# Altium PCB Cubit2_0.PcbDoc (part 4 of 4)
Units mm, origin at the board's own origin, x right, y up, seen from the top; angles counter-clockwise.
Board outline 116.28 x 70 mm, 4 copper layers (Top Layer, Layer 2, Layer 3, Bottom Layer), stack 0.602 mm thick; 141 components, 99 nets, 462 pads, 294 vias.
Unrouted connection lines stored in the file: 2.
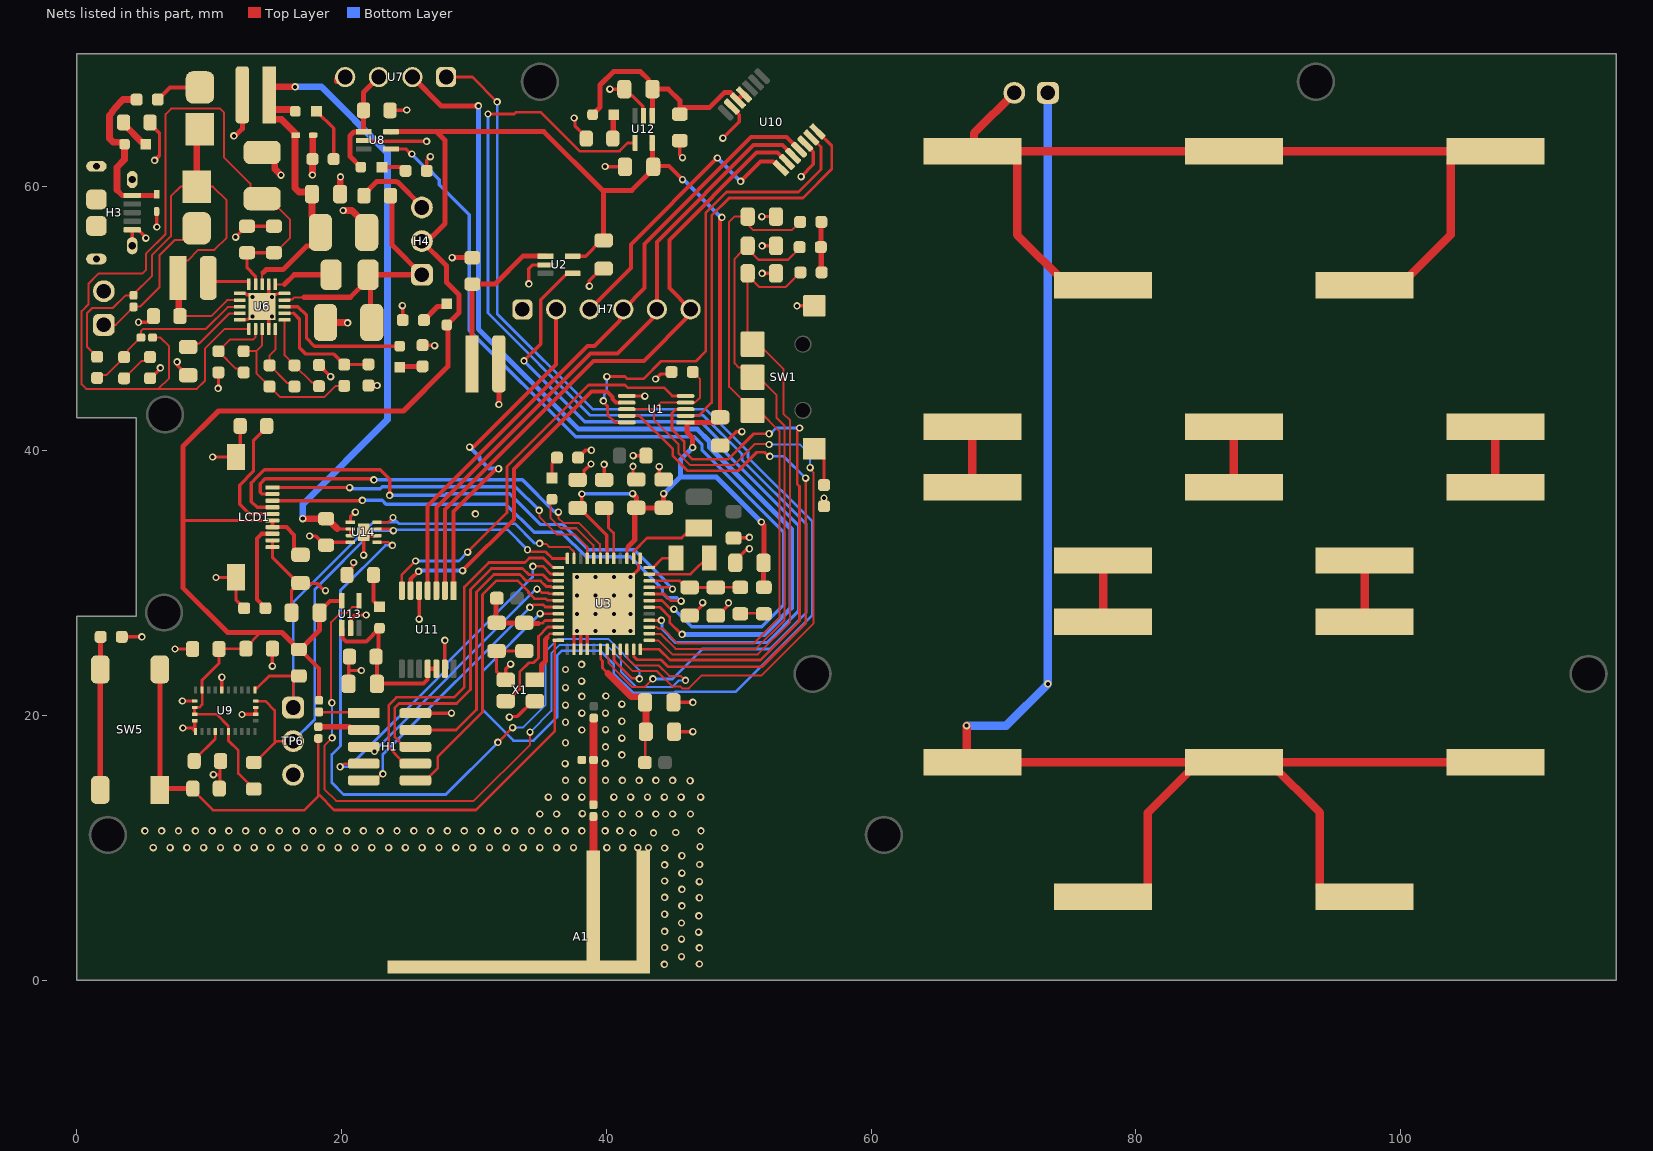
[diagram p4: the nets of this part, all layers, seen from the top]

## Via types
v1: diameter 0.559, hole 0.305, Top Layer to Bottom Layer, tented both sides, 291 vias
v2: diameter 0.61, hole 0.305, Top Layer to Bottom Layer, tented both sides, 2 vias
v3: diameter 0.559, hole 0.305, Top Layer to Bottom Layer, 1 vias

## Nets (pads, with @x,y where several pads share a name; then routed paths per layer and width w, separated by ;. In a path a pad name is that pad's centre, name@x,y a point inside that pad or via, vN(x,y) a via of type N, cw(c..) or ccw(c..) an arc to the next point about the centre after c; other vN are vias at no path point) (continued)
+3V2_VMCU: C1.1 C6.1 C13.1 C14.1 C17.1 C29.1 C30.1 C33.1 C38.1 C39.1 C41.1 H4.2 L6.1 LCD1.6 LCD1.7 LED6.A R10.1 R11.1 R12.1 U1.1 U2.5 U3.39 U3.42 U8.5 U9.3 U9.4 U9.11 U9.28 U12.5 U13.5 | length 195.7
  Top Layer w0.203: R10.1@13.36,14.463 13.341,14.463 12.954,14.85 12.954,14.87 12.192,15.632 12.192,17.368 11.451,18.109 U9.11@11.451,18.803 11.432,18.822 11.432,19.213 10.529,20.115 U9.4@8.889,20.115 U9.3@8.889,20.615 8.98,20.615 9,20.635 9.249,20.635 9.457,20.843 9.457,21.922 U9.28@9.451,21.928 9.451,22.679 10.738,23.966 C30.1@10.738,25.039 10.75,25.052 12.754,25.052 C29.1@12.767,25.064 12.767,25.164 13.835,26.233
  Top Layer w0.254: 8.152,34.746 LCD1.6@14.771,34.746 ; U2.5@37.45,54.713 38.426,54.713 39.622,55.91 C41.1@39.788,55.91 ; C17.1@37.821,35.687 37.987,35.687 40.023,33.651 40.023,32.69 40.052,32.661 U3.42@40.052,31.883 ; C17.1@37.884,35.751 38.133,36 38.133,36.747 v1(38.14,36.754) ; 39.7,59.69 39.788,59.602 ; U3.39@41.552,31.883 41.552,32.68 41.657,32.785
  Top Layer w0.305: LCD1.6@14.771,34.746 LCD1.7@14.771,34.246 15.817,34.246 16.414,33.649 16.414,32.529 16.786,32.156 C1.1@16.891,32.156 ; R11.1@16.864,25.007 18.288,23.583 R12.1@18.288,21.166 ; C39.1@18.339,27.788 18.339,27.892 19.123,28.677 U13.5@20.015,28.677 ; C38.1@43.469,61.535 44.713,61.535 v1(45.745,60.503) ; C6.1@48.59,42.545 48.59,57.451 48.723,57.584 v1(48.723,57.652)
  Top Layer w0.381: C39.1@18.339,27.788 18.339,26.482 16.864,25.007 R11.1@16.764,25.007 15.488,26.283 13.835,26.283 11.385,26.283 8.001,29.667 8.001,34.595 8.001,34.746 8.001,40.335 10.693,43.028 24.663,43.028 28.016,46.38 28.016,49.441 LED6.A@27.94,49.517 28.88,50.457 28.88,51.778 27.915,52.743 27.915,54 H4.2@26.06,55.855 26.404,55.855 26.794,56.245 26.883,56.245 27.813,57.175 27.813,63.475 27.169,64.119 ; U8.5@23.724,64.11 23.733,64.119 27.169,64.119 ; C41.1@39.788,55.91 39.788,59.602 ; 41.657,32.785 42.14,33.269 42.14,35.587 C13.1@42.266,35.712 42.266,36.49 41.982,36.773 v1(41.982,36.779) ; C13.1@42.393,35.687 C14.1@44.323,35.687 ; U12.5@43.459,63.271 43.469,63.262 C38.1@43.469,61.535 ; C38.1@43.536,61.468 43.536,61.301 41.924,59.69 39.7,59.69 35.271,64.119 27.169,64.119 ; C14.1@44.323,35.712 v1(44.323,36.779) ; U1.1@46.098,42.101 46.098,41.398 46.513,40.983 v1(46.513,40.264) ; U1.1@46.098,42.152 C6.1@48.574,42.152 ; v1(51.701,34.632) 51.701,34.584 51.892,34.393 C33.1@51.892,31.572 ; C33.1@51.867,31.547 51.88,31.534 51.88,29.715 L6.1@51.892,29.702
  Bottom Layer w0.254: v1(38.14,36.754) 38.152,36.767 41.97,36.767 v1(41.982,36.779)
  Bottom Layer w0.305: v1(45.745,60.503) 45.809,60.503 48.659,57.652 v1(48.723,57.652)
  Bottom Layer w0.381: v1(44.323,36.779) 45.58,38.036 ; v1(46.513,40.264) 45.58,39.332 45.58,38.036 ; v1(51.701,34.632) 48.297,38.036 45.58,38.036
+3V2_VMCU_S: R2.2 R3.2 R5.2 | length 3.9
  Top Layer w0.381: R2.2@56.236,57.302 56.216,57.283 56.216,55.416 R3.2@56.197,55.397 56.229,55.366 56.229,53.524 R5.2@56.261,53.492
+3V7_VBAT: C24.1 C25.1 C42.1 H2.V+ LED7.A U4.1 U6.18 U14.2 U14.3 | length 67.8
  Top Layer w0.152: U6.18@13.995,52.592 13.995,53.402 14.066,53.472
  Top Layer w0.203: 19.66,34.145 19.697,34.108 U14.2@20.663,34.108 U14.3@20.663,33.608
  Top Layer w0.381: 14.066,53.472 14.289,53.696 15.573,53.696 17.36,55.483 17.727,55.483 18.392,56.148 C24.1@18.392,56.515
  Top Layer w0.508: U4.1@16.475,63.802 16.475,59.865 16.773,59.567 17.598,59.567 C25.1@17.755,59.411 17.755,57.777 18.392,57.139 C24.1@18.392,56.515 ; v1(16.485,67.513) 14.783,67.513 14.529,67.259 H2.V+@14.529,66.904 H2.V+@14.529,66.059 ; LED7.A@16.497,65.659 16.351,65.805 14.783,65.805 H2.V+@14.529,66.059 ; U4.1@16.6,63.909 15.455,65.054 14.783,65.054 14.529,65.308 H2.V+@14.529,66.059 ; v1(17.059,34.884) C42.1@18.821,34.884 18.921,34.884 19.66,34.145
  Bottom Layer w0.508: v1(16.485,67.513) 18.466,67.513 23.47,62.509 23.47,42.367 17.059,35.957 v1(17.059,34.884)
+5V_VBUS: H3.1 LED8.A R23.1 U5.1 | length 12.4
  Top Layer w0.381: 3.025,59.713 3.432,59.306 U5.1@5.95,59.306
  Top Layer w0.508: 3.025,59.713 3.025,61.435 3.598,62.008 LED8.A@3.598,63.17 3.452,63.316 2.761,63.316 2.613,63.464 2.464,63.613 2.464,65.35 cw(c10,60.008) 3.181,66.239 3.489,66.548 R23.1@4.509,66.548
AVDD: C18.1 C19.1 R17.2 U3.34 | length 7.1
  Top Layer w0.203: U3.34@43.237,30.198 45.53,30.198 46.036,29.693 C19.1@46.292,29.693 48.273,29.693 48.278,29.697 50.148,29.697 R17.2@50.153,29.702
BATT_MON_ALRT: U3.20 U14.5 | length 57.2
  Top Layer w0.203: U14.5@22.669,33.126 22.687,33.108 23.488,33.108 23.729,32.868 v1(23.825,32.868) ; v1(31.801,17.983) v1(32.918,19.101) ; U3.20@40.552,25.013 40.566,24.999 40.566,24.502 40.572,24.496 40.572,24.172 41.91,22.834 42.44,22.834 v1(42.494,22.78)
  Bottom Layer w0.152: v1(32.918,19.101) 33.68,19.101 35.408,20.828 35.408,24.858 36.33,25.781 40.163,25.781 42.494,23.45 v1(42.494,22.78)
  Bottom Layer w0.203: v1(23.825,32.868) 23.301,32.868 19.914,29.48 19.914,17.729 19.253,17.069 19.253,14.935 20.142,14.046 27.864,14.046 v1(31.801,17.983)
BRD_Reset: C20.1 R13.1 SW5.1 SW5.2 U3.12 | length 54.6
  Top Layer w0.203: C20.1@8.754,14.398 10.287,12.865 17.181,12.865 18.237,13.92 ; R13.1@18.237,18.288 18.237,13.92 ; U3.12@36.367,25.698 36.122,25.698 36.094,25.67 36.094,18.822 30.154,12.882 19.431,12.882 18.315,13.998 18.237,13.92
  Top Layer w0.381: SW5.2@6.263,23.493 SW5.1@6.263,14.393 6.368,14.498 C20.1@8.754,14.498 C20.1@8.754,14.398
DECOUPLE: C16.1 U3.41 | length 4.1
  Top Layer w0.203: C16.1@39.913,35.679 40.159,35.433 40.159,34.198 40.552,33.805 U3.41@40.552,31.883
FEED: A1.FEED L2.2 | length 6.8
  Top Layer w0.254: A1.FEED@38.964,5.613 A1.FEED@39.014,5.664
  Top Layer w0.62: A1.FEED@39.014,5.664 L2.2@39.014,12.387
GND: A1.GND C1.2 C2.2 C3.2 C4.2 C5.2 C6.2 C7.2 C8.2 C9.2 C10.2 C11.2 C12.2 C13.2 C14.2 C15.2 C16.2 C17.2 C18.2 C19.2 C20.2 C21.2 C22.2 C23.2 C24.2 C25.2 C26.2 C27.2 C28.2 C29.2 C30.2 C31.2 C32.2 C33.2 C34.2 C35.2 C36.2 C37.2 C38.2 C39.2 C40.2 C41.2 C42.2 H1.2 H2.V- H3.5 H3.S1 H3.S2 H3.S3 H3.S4 H3.S5 H3.S6 H5.2 H7.1 H8.V- LCD1.9 LCD1.10 LCD1.11 LCD1.12 R1.1 R4.2 R6.1 R16.2 R18.1 R20.2 R26.1 R27.2 R31.2 R32.1 R34.1 R35.2 R36.1 R38.2 R40.2 R42.2 SW1.5 TP6.3 U1.6 U2.2 U3.0 U3.14 U3.15 U3.16 U3.37 U4.2 U5.2 U6.0 U6.1 U6.5 U6.9 U6.15 U6.17 U7.4 U8.2 U9.2 U9.5 U9.6 U9.17 U9.18 U9.25 U10.5 U10.13 U11.5 U11.13 U12.2 U13.2 U14.0 U14.1 U14.4 U14.6 X1.2 X1.4 | length 168.6
  Top Layer w0.203: U6.5@12.305,49.902 12.334,49.93 12.897,49.93 12.945,49.978 13.072,49.978 v1(13.259,50.165) ; U6.0@14.859,51.766 14.919,51.825 15.071,51.825 15.126,51.88 15.664,51.88 U6.15@15.685,51.902 ; 42.426,31.072 42.426,31.448 U3.37@42.549,31.571
  Top Layer w0.254: R18.1@3.391,25.959 v1(4.902,25.959) ; H3.S2@4.175,55.506 H3.5@4.175,56.706 4.65,56.706 5.207,56.149 v1(5.207,56.083) ; v1(4.655,49.726) 5.317,49.726 5.385,49.793 5.418,49.793 5.782,50.157 C26.2@5.782,50.19 ; R20.2@5.525,45.496 5.578,45.496 6.299,46.216 v1(6.299,46.279) ; R35.2@5.525,64.821 5.525,64.721 6.238,64.008 6.238,62.322 v1(5.867,61.951) ; U5.2@6.02,58.092 6.02,56.947 v1(6.045,56.921) ; v1(7.411,25.039) C30.2@8.738,25.039 ; v1(7.569,46.736) 7.569,46.467 8.316,45.72 C27.2@8.407,45.72 ; v1(7.968,21.115) U9.2@8.889,21.115 ; v1(8.001,19.075) 8.679,19.075 U9.6@8.951,18.803 8.951,18.936 8.889,18.999 U9.5@8.889,19.615 ; v1(10.26,39.546) LCD1.11@12.021,39.546 12.335,39.86 C2.2@12.335,41.885 ; v1(10.312,15.545) 10.804,15.545 ; v1(10.507,30.446) LCD1.12@12.021,30.446 12.021,28.733 R1.1@12.637,28.118 ; v1(10.668,44.729) 10.693,44.755 R32.1@10.693,45.936 ; C20.2@10.754,14.498 10.804,14.549 10.804,15.545 ; C31.2@10.855,16.581 10.804,16.53 10.804,15.545 ; U9.25@10.951,21.928 v1(10.951,22.907) ; v1(11.989,56.159) 11.989,56.189 12.782,56.982 C23.2@12.852,56.982 C22.2@14.884,56.982 ; U6.1@12.305,51.902 12.308,51.899 12.719,51.899 12.818,51.8 13.097,51.8 v1(13.259,51.638) ; v1(12.471,20.091) 12.493,20.113 U9.17@13.514,20.115 U9.17@13.514,20.115 U9.18@13.514,20.615 ; v1(13.995,50.902) 14.495,51.402 U6.17@14.495,52.592 ; U6.9@14.495,49.212 14.495,50.004 14.657,50.165 v1(14.732,50.165) ; v1(14.732,51.638) U6.0@14.859,51.766 ; v1(14.767,23.74) C29.2@14.767,25.064 ; LCD1.9@14.771,33.246 LCD1.10@14.771,32.746 14.771,31.976 16.724,30.023 C1.2@16.8,30.023 ; U6.15@15.4,51.902 U6.15@15.685,51.902 ; C39.2@16.205,27.788 16.205,29.428 C1.2@16.8,30.023 ; v1@17.577,33.604 v1(17.577,33.579) 18.024,33.579 18.719,32.884 C42.2@18.821,32.884 19.046,33.108 U14.4@20.663,33.108 ; R36.1@18.288,46.495 v1(19.164,45.618) ; v1(18.781,29.454) 18.698,29.454 18.163,29.989 16.925,29.989 C1.2@16.891,30.023 C1.2@16.8,30.023 ; C25.2@19.888,59.411 19.914,59.436 C25.2@19.901,59.449 ; v1@19.901,60.693 v1(19.914,60.706) ; R42.2@20.403,30.632 20.403,30.799 20.843,31.24 20.843,31.516 v1(20.902,31.575) ; v1@20.422,49.708 v1(20.447,49.682) ; C35.2@20.523,22.403 20.523,23.419 ; C37.2@20.523,24.46 20.523,23.419 ; U13.2@20.65,26.594 U13.2@20.676,26.619 20.73,26.673 20.73,27.343 20.997,27.61 v1(21.844,27.61) ; U14.1@20.663,34.608 20.663,35.036 21.009,35.382 v1(21.031,35.382) ; v1(21.488,23.419) 20.523,23.419 ; v1(21.666,32.131) U14.0@21.666,33.858 21.916,33.608 U14.6@22.669,33.608 ; U8.2@21.666,63.449 21.72,63.395 v1(26.416,63.395) ; R34.1@22.022,44.945 v1(22.682,44.945) ; C32.2@23.657,65.735 24.892,65.735 v1(24.917,65.761) ; v1(24.587,50.978) 24.613,50.952 R27.2@24.613,49.886 ; H1.2@25.572,20.193 v1(28.296,20.193) ; v1(25.85,27.298) U11.5@25.85,29.45 ; R26.1@26.111,47.993 26.987,47.993 v1(27.025,47.955) ; R38.2@26.429,61.163 26.429,61.963 v1(26.695,62.23) ; U11.13@27.8,23.55 v1(27.8,25.692) ; X1.2@32.325,22.708 31.699,23.333 C8.2@31.699,24.892 C9.2@33.807,24.892 ; X1.2@32.395,22.708 32.395,23.53 v1(32.766,23.901) ; v1(32.664,19.888) 32.723,19.947 33.284,19.947 34.445,21.108 X1.4@34.595,21.108 ; v1(34.138,52.629) 34.138,53.772 34.419,54.053 U2.2@35.392,54.053 ; U3.14@37.552,25.013 37.552,26.198 v1(37.77,26.416) ; v1(37.567,65.151) 37.625,65.093 37.625,64.558 38.481,63.702 R40.2@38.481,63.602 ; C17.2@37.821,37.821 37.912,37.821 38.307,38.216 38.307,38.511 38.811,39.014 v1(38.837,39.014) ; R16.2@37.859,39.497 38.435,40.073 38.844,40.073 v1(38.862,40.056) ; U3.15@38.052,25.013 38.052,26.698 U3.0@38.552,27.198 ; U3.16@38.552,25.013 U3.0@38.552,27.198 ; v1(38.71,52.451) 38.71,52.865 39.621,53.777 C41.2@39.788,53.777 ; C16.2@39.827,37.821 v1(39.827,38.989) ; v1(39.903,61.493) 39.929,61.468 C38.2@41.402,61.468 ; v1@40.259,67.323 v1(40.259,67.335) C34.2@41.351,67.335 41.351,67.244 41.747,66.849 41.949,66.849 42.745,66.052 42.745,65.383 U12.2@42.799,65.329 ; U1.6@41.536,44.155 42.891,44.155 v1(42.901,44.145) ; v1@41.935,39.649 v1(42.02,39.649) C15.2@42.986,39.649 ; v1(42.012,38.837) 42.012,38.1 C13.2@42.266,37.846 ; 42.426,31.072 v1(41.834,30.48) U3.0@39.802,28.448 U3.0@38.552,27.198 ; U3.37@42.549,31.571 U3.37@42.549,31.88 ; v1(43.713,45.441) 44.089,45.816 44.762,45.816 R6.1@44.92,45.974 ; v1(43.993,38.811) 44.005,38.799 44.005,38.188 43.993,38.176 C14.2@44.323,37.846 ; C11.2@45.06,21.006 v1(46.533,21.006) ; C10.2@45.11,18.796 v1(46.533,18.796) ; C36.2@45.542,63.373 45.542,62.357 v1(45.745,62.154) ; C19.2@46.292,27.559 46.458,27.559 47.211,28.312 47.211,28.478 v1(47.269,28.537) ; C18.2@48.26,27.559 48.427,27.559 49.167,28.299 49.167,28.466 v1(49.225,28.524) ; C6.2@48.59,40.411 48.757,40.411 49.809,41.464 v1(50.227,41.464) ; v1(48.793,63.627) 50.025,64.859 50.025,65.396 49.471,65.951 U10.13@49.471,66.013 ; C12.2@49.606,33.417 49.636,33.447 50.77,33.447 v1(50.8,33.477) ; C33.2@49.733,31.547 49.733,31.713 50.575,32.555 50.742,32.555 v1(50.8,32.614) ; v1(51.74,57.709) C3.2@52.807,57.709 ; v1(51.765,53.416) C5.2@52.807,53.416 ; v1(51.765,55.499) C4.2@52.807,55.499 ; v1(54.397,50.968) SW1.5@56.217,50.968 ; v1(54.712,60.731) 55.627,61.647 55.627,62.591 55.022,63.196 U10.5@55.022,63.22 ; R4.2@56.439,35.827 v1(56.439,36.443) v1@56.439,36.474
  Top Layer w0.381: v1(11.862,63.805) 11.963,63.805 12.497,64.338 H2.V-@12.497,66.904 ; U7.4@19.609,67.915 U7.4@19.609,68.097 ; v1(28.352,54.604) C40.2@29.869,54.604 ; v1(31.877,43.51) H8.V-@31.877,46.584
  Top Layer w0.508: C21.2@13.995,62.558 14.225,62.558 14.949,61.833 14.949,61.302 v1(15.418,60.833) ; v1(17.793,60.846) R31.2@17.793,62.052 17.819,62.079 17.819,63.829 U4.2@17.846,63.856 ; C28.2@18.773,49.708 v1@20.422,49.708 ; C25.2@19.901,59.449 v1@19.901,60.693 ; v1(20.117,58.166) 20.766,58.166 21.892,57.04 C24.2@21.892,56.515
  other v1: 44.374,1.219 47.015,1.245 45.669,1.803 47.015,2.464 44.399,2.489 45.669,3.124 46.965,3.658 44.399,3.708 45.669,4.343 46.99,4.877 44.399,5.004 45.695,5.639 47.015,6.248 44.399,6.274 45.695,6.883 47.015,7.468 44.399,7.518 45.695,8.103 44.399,8.738 47.041,8.763 45.695,9.423 44.399,10.008 5.766,10.033 7.036,10.033 8.306,10.033 9.576,10.033 10.846,10.033 12.116,10.033 13.386,10.033 14.656,10.033 15.926,10.033 17.196,10.033 18.466,10.033 19.736,10.033 21.006,10.033 22.276,10.033 23.546,10.033 24.816,10.033 26.086,10.033 27.356,10.033 28.626,10.033 29.896,10.033 31.166,10.033 32.436,10.033 33.706,10.033 34.976,10.033 36.246,10.033 37.516,10.033 40.03,10.033 41.224,10.033 42.367,10.033 43.179,10.035 47.066,10.109 42.012,11.151 43.561,11.151 45.237,11.176 5.131,11.303 6.401,11.303 7.671,11.303 8.941,11.303 10.211,11.303 11.481,11.303 12.751,11.303 14.021,11.303 15.291,11.303 16.561,11.303 17.831,11.303 19.101,11.303 20.371,11.303 21.641,11.303 22.911,11.303 24.181,11.303 25.451,11.303 26.721,11.303 27.991,11.303 29.261,11.303 30.531,11.303 31.801,11.303 33.071,11.303 34.341,11.303 35.611,11.303 36.881,11.303 38.151,11.303 39.903,11.303 41.021,11.303 47.142,11.303 34.976,12.573 36.246,12.573 39.929,12.573 41.199,12.573 42.469,12.573 43.739,12.573 45.009,12.573 46.355,12.573 38.176,12.598 35.611,13.843 36.881,13.843 38.151,13.843 40.564,13.843 41.834,13.843 43.104,13.843 44.374,13.843 45.644,13.843 47.117,13.843 46.33,15.088 36.906,15.113 38.176,15.113 39.929,15.113 41.199,15.113 42.469,15.113 43.739,15.113 45.009,15.113 36.881,16.383 39.903,16.408 41.173,17.043 39.929,17.653 36.906,17.958 41.173,18.313 38.151,18.923 39.929,18.948 36.906,19.507 41.173,19.583 38.151,20.193 39.929,20.193 36.906,20.803 41.173,20.879 38.151,21.463 39.954,21.488 36.906,22.123 38.125,22.606 36.906,23.495 38.125,23.876 39.167,26.416 40.564,26.416 41.834,26.416 37.77,27.686 39.167,27.686 40.564,27.686 41.834,27.686 39.167,29.083 40.564,29.083 41.834,29.083 39.167,30.48 40.564,30.48 30.099,35.255
  other v2: 37.77,29.083 37.77,30.48
HFXTAL_N: U3.10 X1.3 | length 8
  Top Layer w0.203: X1.3@32.395,21.108 32.545,21.108 33.45,22.013 33.45,23.316 34.137,24.003 34.498,24.003 34.863,24.368 34.863,25.999 35.562,26.698 U3.10@36.367,26.698
HFXTAL_P: U3.11 X1.1 | length 4.7
  Top Layer w0.203: 35.503,25.867 35.537,25.901 35.537,25.987 35.748,26.198 U3.11@36.367,26.198
  Top Layer w0.381: X1.1@34.595,22.708 34.745,22.708 35.104,23.067 35.104,23.837 35.409,24.141 35.409,25.773 35.503,25.867
I2C0_SCL: R10.2 TP6.2 U3.48 U9.19 U14.7 | length 43.2
  Top Layer w0.203: R10.2@13.36,16.463 13.46,16.463 14.935,17.938 ; U9.19@13.514,21.115 13.533,21.096 14.235,21.096 14.935,20.396 14.935,17.938 ; TP6.2@16.332,18.079 15.077,18.079 14.935,17.938 ; U14.7@22.669,34.108 23.787,34.108 23.901,33.993 v1(23.901,33.985) ; v1(34.038,32.538) 34.134,32.538 34.296,32.376 35.419,32.376 35.912,31.883 U3.48@37.052,31.883
  Bottom Layer w0.203: TP6.2@16.332,18.079 17.966,19.713 17.966,29.537 22.414,33.985 23.749,33.985 v1@23.901,34.138 ; v1(23.901,33.985) 23.969,34.053 32.523,34.053 v1(34.038,32.538)
I2C0_SDA: R11.2 TP6.1 U3.47 U9.20 U14.8 | length 41.3
  Top Layer w0.152: v1(34.95,33.02) 34.987,32.983 35.458,32.983 35.703,32.738 37.194,32.738 37.549,32.384 U3.47@37.549,31.886
  Top Layer w0.203: U9.20@13.451,21.928 13.451,22.065 13.475,22.089 13.612,22.089 14.531,23.007 R11.2@16.744,23.007 ; TP6.1@16.332,20.619 16.332,22.595 R11.2@16.744,23.007 ; R11.2@16.764,23.007 R11.2@16.744,23.007 ; U14.8@22.669,34.608 23.508,34.608 v1(23.876,34.976)
  Top Layer w0.254: U3.47@37.549,31.886 U3.47@37.552,31.883
  Bottom Layer w0.203: TP6.1@16.332,20.619 16.332,28.55 22.403,34.62 24.203,34.62 ; v1(23.876,34.976) 23.876,34.947 24.203,34.62 ; v1(34.95,33.02) 34.931,33.039 34.55,33.039 33.079,34.51 24.313,34.51 24.203,34.62
IMU_CAP: C31.1 U9.9 | length 2.9
  Top Layer w0.203: C31.1@8.841,16.595 C31.1@8.855,16.581 8.855,16.639 10.451,18.236 U9.9@10.451,18.803
LASER_PWR: C40.1 H8.V+ U2.1 | length 12.4
  Top Layer w0.381: H8.V+@29.845,46.584 29.857,46.595 29.857,52.592 C40.1@29.869,52.604 31.581,52.604 33.69,54.713 U2.1@35.392,54.713 U2.1@35.387,54.718
LASER_SW: U2.4 U3.28 | length 54.3
  Top Layer w0.254: v1(33.772,46.802) 35.052,48.082 35.052,51.415 37.055,53.418 U2.4@37.45,53.418 ; U3.28@43.237,27.198 44.134,27.198 v1(44.144,27.208)
  Bottom Layer w0.254: v1(33.772,46.802) 38.356,42.218 47.109,42.218 48.367,40.961 48.367,40.517 54.534,34.35 54.534,27.921 52.14,25.527 45.243,25.527 44.203,26.568 44.203,27.15 v1(44.144,27.208)
LBOOST: L7.2 U6.20 | length 3.2
  Top Layer w0.203: L7.2@9.957,52.807 12.967,52.807 12.995,52.778 U6.20@12.995,52.592
LBUCK: L8.1 U6.16 | length 4.5
  Top Layer w0.152: U6.16@14.995,52.592 15.685,52.592
  Top Layer w0.381: 15.685,52.592 16.408,53.315 L8.1@19.199,53.315
LCD_CS: LCD1.3 U3.32 | length 36.8
  Top Layer w0.203: U3.32@43.237,29.198 44.347,29.198 44.853,28.691 45.606,28.691 v1(45.641,28.656)
  Top Layer w0.254: LCD1.3@14.771,36.246 21.539,36.246 v1(21.565,36.271)
  Bottom Layer w0.254: v1(21.565,36.271) 23.063,36.271 23.348,35.986 32.406,35.986 34.533,33.858 36.601,33.858 38.462,31.998 41.789,31.998 44.239,29.548 44.239,29.268 44.605,28.903 45.312,28.903 45.558,28.656 v1(45.641,28.656)
LCD_EXTCOM: LCD1.4 U3.33 | length 41.8
  Top Layer w0.203: U3.33@43.238,29.697 44.765,29.697 44.899,29.563 v1(44.995,29.563)
  Top Layer w0.254: LCD1.4@14.771,35.746 13.606,35.746 13.183,36.17 13.183,37.592 13.357,37.766 13.357,37.774 14.165,38.583 22.911,38.583 23.622,37.871 v1(23.622,36.646)
  Bottom Layer w0.254: v1(23.622,36.646) 27.753,36.646 27.887,36.779 32.715,36.779 35.052,34.442 36.736,34.442 38.63,32.548 42.103,32.548 44.484,30.166 44.484,30.073 v1(44.995,29.563)
LFXTAL_N: U3.35 Y1.2 | length 5.5
  Top Layer w0.203: U3.35@43.237,30.698 46.369,30.698 47.783,32.112 Y1.2@47.783,32.512
LFXTAL_P: U3.36 Y1.1 | length 2.3
  Top Layer w0.203: U3.36@43.237,31.198 43.537,31.198 44.241,31.902 Y1.1@45.257,31.902
MAG_ENC_A: U1.3 U3.24 | length 43.2
  Top Layer w0.203: U3.24@42.552,25.013 43.991,25.013 44.798,24.206 51.626,24.206 54.592,27.172 54.592,37.329 54.414,37.507 54.414,41.452 54.598,41.636 v1(54.598,41.732) ; U1.3@45.43,43.123 45.955,43.123 45.92,43.158 45.25,43.158 44.956,42.864 44.956,41.641 45.878,40.72 45.878,40.001 46.509,39.37 49.2,39.37 51.13,41.3 v1(52.299,41.3)
  Bottom Layer w0.203: v1(52.299,41.3) 52.395,41.3 52.827,41.732 v1(54.598,41.732)
MAG_ENC_B: U1.9 U3.23 | length 43.1
  Top Layer w0.203: U1.9@41.536,42.655 42.516,42.655 45.014,40.157 45.014,39.633 46.141,38.506 49.958,38.506 51.357,39.905 51.946,39.905 52.253,39.599 v1(52.349,39.599) ; U3.23@42.052,25.013 42.066,24.999 42.066,24.474 42.313,24.227 44.13,24.227 44.659,23.698 51.764,23.698 55.049,26.983 v1(55.049,37.948)
  Bottom Layer w0.203: v1(52.349,39.599) 53.398,39.599 v1(55.049,37.948)
MAG_ENC_DATA_SW: R6.2 U1.4 U1.8 U3.21 | length 54.6
  Top Layer w0.152: U3.21@41.052,25.013 41.052,24.303 41.965,23.389 43.783,23.389 44.959,22.214 45.574,22.214 45.725,22.062 46.232,22.062 47.211,23.042 51.719,23.042 55.659,26.982 55.659,37.296 55.659,38.365 55.397,38.626 v1(55.397,38.736) ; U1.8@41.536,43.155 43.609,43.155 ; R6.2@46.52,45.974 47.076,45.418 47.076,44.04 46.71,43.674 46.58,43.674 46.56,43.655 U1.4@45.986,43.655 44.109,43.655 43.609,43.155 ; v1(52.299,40.488) 52.265,40.522 51.19,40.522 49.606,38.938 46.33,38.938 45.446,39.822 45.446,40.494 43.609,42.331 43.609,43.155
  Bottom Layer w0.152: v1(52.299,40.488) 52.316,40.505 54.598,40.505 55.397,39.706 v1(55.397,38.736)
MAG_ENC_P_A: U1.5 U11.7 | length 31
  Top Layer w0.203: U11.7@24.55,29.45 24.55,30.656 v1(25.585,31.692) ; v1(29.515,32.36) 32.495,35.34 32.495,38.833 38.649,44.987 41.397,44.987 41.604,44.78 44.352,44.78 44.978,44.155 U1.5@45.986,44.155
  Bottom Layer w0.203: v1(25.585,31.692) 28.847,31.692 v1(29.515,32.36)
MAG_ENC_P_B: U1.7 U11.6 | length 25.2
  Top Layer w0.305: U11.6@25.2,29.45 25.219,29.469 25.219,30.316 v1(25.814,30.912) ; v1(29.136,30.963) 33.003,34.83 33.003,38.622 38.859,44.479 40.049,44.479 40.451,44.077 40.451,43.928 40.725,43.655 U1.7@41.014,43.655
  Bottom Layer w0.305: v1(25.814,30.912) 25.863,30.96 26.042,30.96 26.045,30.963 v1(29.136,30.963)
MAG_ENC_P_CS: H7.2 U11.1 | length 27
  Top Layer w0.305: U11.1@28.45,29.45 28.45,35.435 31.624,38.609 31.804,38.609 v1(31.853,38.658) ; v1(29.667,40.284) 29.716,40.333 30.007,40.333 36.195,46.521 H7.2@36.195,50.698
  Bottom Layer w0.305: v1(29.667,40.284) 30.416,39.536 30.416,39.376 31.116,38.676 31.835,38.676 v1(31.853,38.658)
MAG_ENC_P_PW: C35.1 C37.1 LED12.A U11.11 U11.12 U13.1 | length 13.5
  Top Layer w0.305: U13.1@20.015,26.619 20.063,26.572 20.063,26.004 20.069,25.998 20.069,25.885 20.337,25.618 21.858,25.618 LED12.A@22.86,26.619 ; LED12.A@22.771,26.531 22.771,24.803 22.682,24.714 22.682,22.657 22.895,22.444 26.177,22.444 26.481,22.748 26.481,23.531 U11.11@26.5,23.55 U11.12@27.15,23.55
MAG_ENC_P_SW: U3.22 U13.4 | length 59.3
  Top Layer w0.152: v1(19.253,20.98) 19.202,21.031 19.202,27.068 19.885,27.751 20.333,27.751 20.789,28.208 21.187,28.208 21.311,28.332 U13.4@21.311,28.677 ; v1(19.279,18.33) 19.135,18.187 19.135,18.17 18.694,17.729 18.694,14.453 19.583,13.564 29.972,13.564 34.231,17.823 v1(34.231,18.753) ; U3.22@41.552,25.013 41.575,24.99 41.575,24.354 42.134,23.796 43.951,23.796 44.735,23.012 45.598,23.012 45.939,22.672 v1(45.976,22.672)
  Bottom Layer w0.152: v1(19.253,20.98) 19.266,20.968 19.266,18.343 v1(19.279,18.33) ; v1(34.231,18.753) 35.839,20.362 35.839,24.116 35.839,24.715 36.473,25.349 37.073,25.349 39.978,25.349 41.11,24.217 41.11,23.302 42.242,22.17 44.979,22.17 45.468,22.659 45.963,22.659 v1(45.976,22.672)
MAG_ENC_W_A: U1.2 U10.7 | length 30.3
  Top Layer w0.203: U1.2@45.986,42.655 45.988,42.656 46.952,42.656 47.955,43.66 47.955,57.783 49.278,59.106 54.839,59.106 57.023,61.29 57.023,63.057 U10.7@55.941,64.139
MAG_ENC_W_B: U1.10 U10.6 | length 36.1
  Top Layer w0.203: v1(39.765,43.793) 39.765,43.697 40.083,43.379 40.083,43.141 40.098,43.125 40.098,42.731 40.68,42.149 U1.10@41.211,42.149 ; v1(40.03,45.622) 41.398,45.622 41.553,45.466 42.824,45.466 44.138,46.78 46.754,46.78 47.498,47.523 47.498,57.972 49.089,59.563 54.508,59.563 56.21,61.265 56.21,62.98 U10.6@55.507,63.683
  Bottom Layer w0.203: v1(39.765,43.793) 39.833,43.861 39.833,44.281 40.03,44.479 v1(40.03,45.622)
MAG_ENC_W_CS: H7.3 U10.1 | length 21.6
  Top Layer w0.305: H7.3@38.735,50.698 41.859,53.823 41.859,55.602 v1@48.259,62.002 ; v1(50.147,60.37) 51.649,61.872 52.591,61.872 53.081,61.381 U10.1@53.174,61.381
  Bottom Layer w0.305: v1(48.387,62.13) v1(50.147,60.37)
MAG_ENC_W_PW: C34.1 C36.1 LED11.A U10.11 U10.12 U12.1 | length 19.6
  Top Layer w0.381: LED11.A@38.951,65.405 39.522,65.976 39.522,67.64 40.551,68.669 42.558,68.669 43.189,68.038 43.189,67.631 C34.1@43.485,67.335 ; U12.1@43.459,65.329 43.459,65.724 43.485,65.749 C34.1@43.485,67.21 ; C34.1@43.822,66.873 C34.1@43.485,67.21 ; C36.1@45.542,65.507 45.542,65.94 ; U10.11@50.583,66.839 50.413,67.009 49.928,66.524 49.958,66.494 49.958,66.473 49.366,67.065 48.905,67.065 47.78,65.94 45.542,65.94 ; C34.1@43.485,67.21 C34.1@43.485,67.335 ; C34.1@43.485,67.335 44.679,67.335 45.542,66.472 45.542,65.94
MAG_ENC_W_SW: U3.19 U12.4 | length 84.4
  Top Layer w0.152: U3.19@40.052,25.013 40.092,24.973 40.092,24.366 40.14,24.317 40.14,23.993 41.963,22.17 42.901,22.17 v1(43.51,22.78)
  Top Layer w0.203: v1(31.051,65.456) 33.032,65.456 33.159,65.583 35.043,65.583 37.98,62.646 40.982,62.646 41.607,63.271 U12.4@42.164,63.271
  Bottom Layer w0.203: v1(31.051,65.456) 31.051,50.42 38.771,42.701 47.309,42.701 50.237,39.773 50.237,39.329 55.1,34.466 55.1,27.789 52.355,25.044 47.243,25.044 44.978,22.78 v1(43.51,22.78)
NetC2_1: C2.1 LCD1.5 | length 9.5
  Top Layer w0.203: C2.1@14.335,41.785 C2.1@14.335,41.885
  Top Layer w0.254: C2.1@14.335,41.785 13.335,40.785 13.335,38.471 12.294,37.429 12.294,35.985 13.025,35.254 LCD1.5@14.763,35.254
NetC7_1: C7.1 L1.2 L2.1 | length 6.6
  Top Layer w0.254: L2.1@39.014,13.267 L2.1@39.018,13.271 ; C7.1@39.018,16.658 C7.1@39.023,16.662 C7.1@39.033,16.672 ; L1.2@39.033,19.819 L1.2@39.043,19.829
  Top Layer w0.62: L2.1@39.018,13.271 C7.1@39.018,16.658 ; C7.1@39.033,16.672 L1.2@39.033,19.819
NetD1_A: D1.A R23.2 | length 3.6
  Top Layer w0.305: R23.2@6.109,66.548 7.023,67.463 D1.A@9.296,67.463
NetH1_1: H1.1 R12.2 | length 3.2
  Top Layer w0.203: R12.2@18.466,20.261 21.604,20.261 H1.1@21.672,20.193
NetH1_3: H1.3 R13.2 | length 3.5
  Top Layer w0.381: R13.2@18.237,19.168 20.607,19.168 20.852,18.923 H1.3@21.672,18.923
NetH4_3: H4.3 R25.1 | length 5.7
  Top Layer w0.381: R25.1@21.682,59.284 21.682,59.384 22.649,60.35 24.105,60.35 24.127,60.328 24.22,60.328 26.06,58.488 H4.3@26.06,58.395
NetH6_1: H6.1 S1.V+ S3.V+ S5.V+ S7.V+ S9.V+ | length 124
  Top Layer w0.635: v1(67.208,19.253) 67.208,16.905 S1.V+@67.64,16.473 S5.V+@84.7,16.473 ; S3.V+@77.52,6.313 80.22,6.313 80.903,6.996 80.903,12.676 S5.V+@84.7,16.473 ; S7.V+@97.28,6.313 94.58,6.313 93.898,6.996 93.898,12.676 S5.V+@90.1,16.473 ; S9.V+@107.16,16.473 S5.V+@90.1,16.473 ; S5.V+@84.7,16.473 S5.V+@87.4,16.473 S5.V+@90.1,16.473
  Bottom Layer w0.635: v1(67.208,19.253) 70.206,19.253 v1(73.355,22.403) H6.1@73.355,67.056
NetH6_2: H6.2 S2.V- S4.V- S6.V- S8.V- S10.V- | length 74.6
  Top Layer w0.635: H6.2@70.815,67.056 67.767,64.008 67.767,62.775 S2.V-@67.64,62.648 S2.V-@70.34,62.648 ; S4.V-@77.52,52.527 74.82,52.527 71.023,56.325 71.023,61.965 S2.V-@70.34,62.648 ; S8.V-@97.28,52.527 99.98,52.527 103.778,56.325 103.778,61.965 S10.V-@104.46,62.648 ; S10.V-@107.16,62.648 S10.V-@104.46,62.648 ; S2.V-@70.34,62.648 S6.V-@87.4,62.648 S10.V-@104.46,62.648
NetL6_2: L6.2 R17.1 | length 1.9
  Top Layer w0.203: R17.1@50.544,27.753 L6.2@52.413,27.753
NetLCD1_8: LCD1.8 R1.2 | length 6.9
  Top Layer w0.305: R1.2@14.237,28.118 13.589,28.765 13.589,33.376 13.959,33.746 LCD1.8@14.771,33.746
NetLED4_C: LED4.C R16.1 | length 1.7
  Top Layer w0.203: LED4.C@35.89,37.96 35.89,39.062 36.259,39.43 R16.1@36.259,39.497
NetLED5_C: LED5.C R26.2 | length 1.8
  Top Layer w0.254: LED5.C@24.384,46.317 LED5.C@24.46,46.393
  Top Layer w0.381: LED5.C@24.46,46.393 25.07,46.393 R26.2@26.111,46.393
NetLED6_C: LED6.C R27.1 | length 2.2
  Top Layer w0.381: R27.1@26.213,49.886 27.235,50.908 27.73,50.908 LED6.C@27.94,51.117
NetLED7_C: LED7.C R31.1 | length 4.1
  Top Layer w0.254: LED7.C@18.097,65.659 19.393,64.364 R31.1@19.393,62.052
NetLED8_C: LED8.C R35.1 | length 2.4
  Top Layer w0.508: R35.1@3.525,64.821 3.525,64.721 4.93,63.316 5.052,63.316 LED8.C@5.198,63.17
NetLED10_C: LED10.C R38.1 | length 2
  Top Layer w0.305: LED10.C@23.05,61.443 24.51,61.443 24.789,61.163 R38.1@24.829,61.163
  Top Layer w0.381: R38.1@24.752,61.087 R38.1@24.829,61.163
NetLED11_C: LED11.C R40.1 | length 1.8
  Top Layer w0.381: R40.1@40.481,63.602 40.516,63.637 40.516,65.37 LED11.C@40.551,65.405
NetLED12_C: LED12.C R42.1 | length 3.1
  Top Layer w0.305: R42.1@22.403,30.732 R42.1@22.403,30.632 22.403,28.677 LED12.C@22.86,28.219 LED12.C@22.612,27.972
NetR4_1: R4.1 SW1.1 | length 3.1
  Top Layer w0.203: SW1.1@55.717,40.168 55.74,40.168 56.439,39.469 R4.1@56.439,37.427
NetR18_2: R18.2 SW5.3 SW5.4 | length 11.6
  Top Layer w0.381: SW5.3@1.763,14.393 SW5.4@1.763,23.493 1.777,23.507 1.777,25.945 R18.2@1.791,25.959
NetR19_2: R19.2 R20.1 | length 2.6
  Top Layer w0.152: R19.2@3.57,45.49 4.893,46.814 5.243,46.814 R20.1@5.525,47.096
NetS1_V-: S1.V- S2.V+ | length 4.6
  Top Layer w0.635: S1.V-@67.64,37.273 S2.V+@67.64,41.848
NetS3_V-: S3.V- S4.V+ | length 4.6
  Top Layer w0.635: S3.V-@77.52,27.113 S4.V+@77.52,31.727
NetS5_V-: S5.V- S6.V+ | length 4.6
  Top Layer w0.635: S5.V-@87.4,37.273 S6.V+@87.4,41.848
NetS7_V-: S7.V- S8.V+ | length 4.6
  Top Layer w0.635: S7.V-@97.28,27.113 S8.V+@97.28,31.727
NetS9_V-: S9.V- S10.V+ | length 4.6
  Top Layer w0.635: S9.V-@107.16,37.273 S10.V+@107.16,41.848
OK_HYST: R29.1 R33.2 U6.10 | length 5.5
  Top Layer w0.152: U6.10@14.995,49.212 14.995,47.659 14.554,47.217 R29.1@14.554,46.469 15.872,45.151 16.152,45.151 R33.2@16.434,44.869
OK_PROG: R33.1 R36.2 U6.11 | length 6.2
  Top Layer w0.152: U6.11@15.685,49.902 15.685,47.218 R33.1@16.434,46.469 17.726,45.177 18.006,45.177 R36.2@18.288,44.895
PAVDD: C10.1 C11.1 L4.2 U3.18 | length 10.5
  Top Layer w0.203: U3.18@39.552,25.013 39.566,24.999 39.566,24.28 39.708,24.138 39.708,23.614 40.124,23.198 40.124,23.183 ; L4.2@42.908,16.459 42.942,16.494 42.942,18.761 C10.1@42.977,18.796
  Top Layer w0.508: 40.124,23.183 41.868,21.439 42.648,21.439 42.926,21.161 C11.1@42.926,21.006 42.984,20.948 42.984,18.803 C10.1@42.977,18.796
PTI_DATA: H1.10 U3.6 | length 23.4
  Top Layer w0.203: H1.10@25.572,15.113 26.344,15.113 27.256,16.025 27.256,16.882 30.644,20.269 30.644,29.161 31.689,30.207 33.284,30.207 33.765,29.725 34.119,29.372 34.119,29.294 34.572,28.841 35.406,28.841 35.534,28.712 36.352,28.712 U3.6@36.367,28.698
PTI_FRAME: H1.9 U3.7 | length 21.1
  Top Layer w0.203: H1.9@21.672,15.113 22.54,15.113 23.022,15.596 23.097,15.596 v3(23.114,15.613) ; v1(34.211,28.186) 34.307,28.186 34.505,28.384 35.217,28.384 35.388,28.212 36.352,28.212 U3.7@36.367,28.198
  Bottom Layer w0.203: v3(23.114,15.613) 23.114,17.089 v1(34.211,28.186)
RFVDD: C8.1 C9.1 L3.2 U3.9 | length 6.1
  Top Layer w0.203: 34.858,26.975 35.154,26.975 35.378,27.198 U3.9@36.367,27.198
  Top Layer w0.381: C8.1@31.675,27.026 L3.2@31.675,28.396 ; C8.1@31.725,27 33.782,27 33.807,26.975 34.858,26.975
SOLAR_IN: D2.A H5.1 R24.1 | length 11.7
  Top Layer w0.152: H5.1@1.775,49.531 2.945,49.531 4.344,50.929 4.803,50.929 6.236,52.362 6.236,54.781 7.41,55.956 8.178,55.956 D2.A@9.042,56.82 ; H5.1@2.349,49.216 H5.1@2.372,49.216
SPI_CLK: LCD1.1 U3.45 | length 26.9
  Top Layer w0.152: v1(34.925,35.509) 34.95,35.484 34.95,35.001 36.246,33.706 37.611,33.706 38.552,32.765 38.552,32.203 U3.45@38.569,32.186
  Top Layer w0.254: LCD1.1@14.771,37.246 20.59,37.246 v1(20.599,37.236) ; U3.45@38.549,32.186 38.552,32.183 U3.45@38.552,31.883
  Bottom Layer w0.254: v1(20.599,37.236) 20.658,37.178 20.873,37.178 20.897,37.154 22.91,37.154 23.063,37.306 33.128,37.306 v1(34.925,35.509)
SPI_CLK_MAG: H7.6 U10.2 U11.2 | length 48.5
  Top Layer w0.305: U11.2@27.8,29.45 27.8,35.575 39.037,46.812 42.824,46.812 H7.6@46.279,50.267 ; H7.6@46.355,50.698 44.755,52.299 44.755,55.948 51.351,62.543 52.941,62.543 U10.2@53.643,61.841
SPI_MISO_MAG: H7.5 U10.3 U11.3 | length 48.2
  Top Layer w0.305: U11.3@27.15,29.45 27.15,35.716 38.805,47.371 40.843,47.371 43.891,50.419 43.815,50.495 43.815,55.798 51.119,63.102 53.301,63.102 U10.3@54.103,62.301
SPI_MOSI: LCD1.2 U3.43 | length 30.9
  Top Layer w0.152: v1(36.373,35.382) 36.373,34.925 36.728,34.569 37.897,34.569 39.512,32.954 39.512,31.923 U3.43@39.552,31.883
  Top Layer w0.254: LCD1.2@14.771,36.746 13.992,36.746 13.843,36.895 13.843,37.542 14.208,37.906 22.127,37.906 22.161,37.873 22.37,37.873 v1(22.428,37.814)
  Bottom Layer w0.254: v1(22.428,37.814) 33.661,37.814 36.035,35.441 36.314,35.441 v1(36.373,35.382)
SPI_MOSI_MAG: H7.4 U10.4 U11.4 | length 48.7
  Top Layer w0.305: U11.4@26.5,29.45 26.5,35.856 38.574,47.93 39.097,47.93 41.042,49.875 41.042,50.471 H7.4@41.269,50.698 ; H7.4@41.275,50.698 42.875,52.299 42.875,55.649 50.93,63.703 53.619,63.703 U10.4@54.562,62.76
SW_DOWN: C3.1 R2.1 SW1.2 U3.27 | length 48.7
  Top Layer w0.152: U3.27@43.237,26.698 43.792,26.698 43.892,26.599 44.243,26.599 45.391,25.451 51.11,25.451 52.765,27.106 53.061,27.401 53.061,41.504 SW1.2@51.547,43.018 ; C3.1@50.457,57.326 51.105,56.679 54.012,56.679 R2.1@54.636,57.302 ; C3.1@50.673,57.709 49.671,57.709 49.276,57.314 49.276,44.839 50.182,43.933 50.224,43.933 51.047,43.11 SW1.2@51.047,43.068
SW_GO: C4.1 R3.1 SW1.3 U3.26 | length 46.6
  Top Layer w0.152: U3.26@43.253,26.198 43.269,26.182 44.085,26.182 45.223,25.044 51.279,25.044 53.467,27.233 53.467,41.885 52.857,42.494 52.857,44.207 SW1.3@51.547,45.518 ; C4.1@50.673,55.499 C4.1@50.673,55.332 ; SW1.3@51.047,45.568 50.321,46.293 50.008,46.293 49.682,46.619 49.682,54.515 50.16,54.993 50.333,54.993 C4.1@50.673,55.332 ; R3.1@54.597,55.397 54.597,55.326 53.718,54.446 51.487,54.446 50.673,55.26 C4.1@50.673,55.332
SW_UP: C5.1 R5.1 SW1.4 U3.25 | length 44.6
  Top Layer w0.152: U3.25@43.237,25.698 43.265,25.67 43.945,25.67 44.977,24.638 51.447,24.638 53.873,27.064 53.873,42.316 53.365,42.824 53.365,46.199 51.547,48.018 51.547,48.125 51.488,48.125 50.673,48.94 C5.1@50.673,53.25 ; C5.1@50.673,53.416 C5.1@50.673,53.25 ; R5.1@54.661,53.492 53.555,52.386 51.537,52.386 C5.1@50.673,53.25
SWCLK: H1.8 U3.1 | length 27.9
  Top Layer w0.203: H1.8@25.572,16.383 24.752,16.383 24.032,17.103 24.032,17.139 23.559,17.611 23.559,20.798 24.147,21.386 28.498,21.386 29.272,22.16 29.272,29.729 31.121,31.578 33.839,31.578 34.179,31.919 35.229,31.919 35.57,31.578 35.922,31.226 36.338,31.226 U3.1@36.367,31.198
SWDIO: H1.7 U3.2 | length 25.6
  Top Layer w0.203: v1(19.888,16.145) 19.984,16.145 20.223,16.383 H1.7@21.672,16.383 ; v1(34.442,31.284) 34.459,31.301 35.201,31.301 35.79,30.712 36.352,30.712 U3.2@36.367,30.698
  Bottom Layer w0.203: v1(19.888,16.145) 20.549,16.145 28.018,23.615 28.018,24.058 34.424,30.464 34.424,31.265 v1(34.442,31.284)
SWO: H1.6 U3.3 | length 25.6
  Top Layer w0.203: H1.6@25.572,17.653 24.752,17.653 24.016,18.389 24.016,20.609 24.336,20.929 28.687,20.929 29.729,21.971 29.729,29.54 31.31,31.121 33.663,31.121 34.135,30.649 35.206,30.649 35.643,30.212 36.352,30.212 U3.3@36.367,30.198
Test_Pin: LED4.A U3.44 | length 6.6
  Top Layer w0.152: LED4.A@35.712,36.182 35.763,36.132 35.763,34.96 36.56,34.163 37.728,34.163 39.012,32.879 39.012,31.923 U3.44@39.052,31.883
  Top Layer w0.254: LED4.A@35.712,36.182 LED4.A@35.89,36.36
ULTSEN_PWR: C32.1 LED10.A U7.3 U8.1 | length 8.5
  Top Layer w0.381: LED10.A@21.45,61.443 20.627,62.266 20.627,63.804 20.923,64.1 21.657,64.1 C32.1@21.657,65.735 21.657,67.097 U7.3@22.809,68.25
ULTSEN_SW: U3.31 U8.4 | length 64.4
  Top Layer w0.203: U3.31@43.237,28.698 44.2,28.698 44.774,28.124 45.024,28.124 v1(45.092,28.056)
  Top Layer w0.254: U8.4@23.724,62.814 24.835,62.814 25.216,62.433 v1(25.298,62.433)
  Bottom Layer w0.254: v1(25.298,62.433) 26.294,61.437 26.447,61.437 27.384,60.5 27.384,60.119 29.64,57.863 29.64,49.101 37.667,41.075 46.636,41.075 47.224,40.487 47.224,40.043 53.391,33.877 53.391,28.394 51.721,26.725 46.455,26.725 45.124,28.056 v1(45.092,28.056)
US0_RX: H1.4 U3.4 | length 21.3
  Top Layer w0.203: H1.4@25.572,18.923 28.651,18.923 30.186,20.458 30.186,29.351 31.5,30.664 33.473,30.664 33.946,30.192 35.017,30.192 35.454,29.755 35.785,29.755 35.828,29.712 36.352,29.712 U3.4@36.367,29.698
US0_TX: H1.5 U3.5 | length 20.1
  Top Layer w0.203: H1.5@21.672,17.653 22.122,17.653 v1(22.479,17.296) ; v1(34.754,29.557) 34.85,29.557 35.109,29.298 35.595,29.298 35.681,29.212 36.352,29.212 U3.5@36.367,29.198
  Bottom Layer w0.203: v1(22.479,17.296) 22.479,17.352 34.684,29.557 v1(34.754,29.557)
US2_RX: U3.30 U7.2 | length 71.5
  Top Layer w0.203: U3.30@43.237,28.198 43.251,28.184 44.067,28.184 44.779,27.471 44.779,27.052 45.678,26.153 v1(45.726,26.153)
  Top Layer w0.381: U7.2@25.349,68.25 27.534,66.065 v1(30.328,66.065)
  Bottom Layer w0.381: v1(30.328,66.065) 30.328,49.222 37.903,41.646 46.873,41.646 47.795,40.724 47.795,40.28 53.962,34.113 53.962,28.157 51.958,26.153 v1(45.726,26.153)
US2_TX: U3.8 U7.1 | length 104.3
  Top Layer w0.203: U7.1@27.889,68.25 29.87,68.25 v1(31.75,66.37) ; v1(35,27.71) 35.006,27.704 36.361,27.704 U3.8@36.367,27.698
  Bottom Layer w0.203: v1(31.75,66.37) 31.75,50.368 38.96,43.158 47.499,43.158 50.694,39.962 50.694,39.518 55.557,34.656 55.557,27.6 49.776,21.819 45.238,21.819 45.158,21.738 41.99,21.738 40.563,23.166 40.563,23.882 39.527,24.917 36.652,24.917 36.271,24.536 36.271,19.896 34.494,18.118 32.983,18.118 30.644,20.458 30.644,23.353 v1(35,27.71)
VBAT_OK: LED5.A U6.13 | length 10.9
  Top Layer w0.254: U6.13@15.685,50.902 16.688,50.902 17.348,50.241 17.348,48.514 17.945,47.917 LED5.A@24.384,47.917
VBAT_OV: R28.1 R32.2 U6.7 | length 6.4
  Top Layer w0.152: R28.1@12.598,45.936 12.316,46.218 12.011,46.218 R32.2@10.693,47.536 11.59,48.433 13.33,48.433 13.495,48.598 U6.7@13.495,49.212
VIN_DC: C26.1 D1.C D2.C L7.1 R22.1 R24.2 U6.2 | length 41.7
  Top Layer w0.152: R22.1@1.525,47.121 0.762,47.884 0.762,50.393 1.169,50.8 2.718,50.8 3.678,51.761 R24.2@4.275,51.761 ; R24.2@4.238,51.798 5.69,53.249 5.69,54.81 7.102,56.222 7.102,59.248 7.823,59.97 D2.C@9.042,59.97 10.261,59.97 11.303,58.928 11.303,56.109 10.389,55.194 9.169,55.194 8.357,54.381 8.23,54.381 7.671,53.823 L7.1@7.671,52.807 ; C26.1@7.782,50.19 10.136,50.19 11.347,51.402 U6.2@12.305,51.402
  Top Layer w0.508: L7.1@7.671,52.807 7.701,52.776 C26.1@7.701,50.255 ; D2.C@9.042,59.97 9.042,64.059 D1.C@9.296,64.313
VOC_SAMP: R19.1 R21.1 R22.2 U6.3 | length 13.4
  Top Layer w0.152: R22.2@1.538,45.47 1.804,45.737 2.216,45.737 R19.1@3.57,47.09 3.852,47.372 3.852,47.607 R21.1@4.825,48.581 ; R21.1@4.835,48.571 4.835,49.059 4.997,49.221 9.749,49.221 11.39,50.862 12.266,50.862 U6.3@12.305,50.902
VOUT: C28.1 H4.1 L8.2 R25.2 U6.14 | length 25.2
  Top Layer w0.152: U6.14@15.685,51.402 15.725,51.441 16.248,51.441 16.42,51.613 17.143,51.613
  Top Layer w0.381: 17.143,51.613 20.648,51.613 L8.2@21.999,52.965 ; C28.1@22.174,49.527 L8.2@22.174,52.965 ; C28.1@22.174,49.708 L8.2@22.174,52.965 ; L8.2@22.174,53.092 L8.2@22.174,52.965 ; C28.1@22.273,49.708 C28.1@22.527,49.962 ; R25.2@23.682,59.284 23.8,59.166 23.8,55.575 H4.1@26.06,53.315 22.349,53.315 22.174,53.14 L8.2@22.174,52.965
VOUT_SET: R30.1 R34.2 U6.12 | length 9.2
  Top Layer w0.203: U6.12@15.685,50.402 15.693,50.394 16.383,50.394
  Top Layer w0.254: 16.383,50.394 16.815,49.962 16.815,47.803 17.292,47.326 19.387,47.326 R30.1@20.193,46.52 20.206,46.533 22.009,46.533 R34.2@22.022,46.545
VRDIV: R28.2 R29.2 R30.2 U6.8 | length 12.2
  Top Layer w0.152: R28.2@12.598,47.536 13.551,47.536 ; U6.8@13.995,49.212 13.995,47.981 13.551,47.536 ; R30.2@20.193,44.92 19.549,44.92 18.718,44.089 15.334,44.089 R29.2@14.554,44.869 13.551,45.873 13.551,47.536
VREF_SAMP: C27.1 U6.4 | length 5
  Top Layer w0.152: C27.1@8.407,47.854 8.676,48.122 9.235,48.122 11.498,50.386 12.289,50.386 U6.4@12.305,50.402
VREGSW: L5.1 U3.38 | length 6.3
  Top Layer w0.203: U3.38@42.052,31.883 42.066,31.897 42.066,32.422 43.07,33.426 45.682,33.426 46.615,34.36 L5.1@46.99,34.36
VSTOR: C21.1 C22.1 C23.1 R21.2 U6.6 U6.19 | length 69.1
  Top Layer w0.152: R21.2@5.715,48.571 6.293,48.571 6.96,47.904 6.96,45.505 6.145,44.69 ; U6.6@12.995,49.212 11.134,49.212 9.659,47.737 9.659,45.288 9.062,44.69 6.145,44.69 ; C22.1@14.884,54.982 14.984,54.982 16.104,56.101 16.104,57.474 14.52,59.058 C21.1@13.995,59.058 13.88,59.058 13.109,59.829 13.109,60.195 11.1,62.205 11.1,65.583 10.815,65.868 7.118,65.868 6.696,65.446 6.696,56.39 5.232,54.927 5.232,53.696 4.927,53.391 1.619,53.391 0.877,52.649 0.877,51.082 0.356,50.561 0.356,45.035 0.701,44.69 6.145,44.69
  Top Layer w0.254: 13.484,53.197 12.852,53.829 C23.1@12.852,54.982 C22.1@14.884,54.982 ; U6.19@13.494,52.603 13.494,53.197
pads on no net: H3.2 H3.3 H3.4 MH1.1 MH3.1 MH5.1 MH6.1 MH7.1 MH8.1 MH15.1 MH16.1 SW1.S1 SW1.S2 U2.3 U3.13 U3.29 U8.3 U9.1 U9.7 U9.8 U9.10 U9.12 U9.13 U9.14 U9.15 U9.16 U9.21 U9.22 U9.23 U9.24 U9.26 U9.27 U10.8 U10.9 U10.10 U10.14 U11.8 U11.9 U11.10 U11.14 U12.3 U13.3

## Polygon pours and split planes (outlines as drawn)
GND on Layer 2 "GND_L2" (solid, pour order 1): 0.383,8.992 57.226,8.992 57.226,69.621 0.356,69.621
GND on Layer 3 "GND_L2" (solid, pour order 6): 0.433,8.992 57.277,8.992 57.277,69.621 0.406,69.621
GND on Top Layer "GND_L01_P007" (solid, pour order 11): 0.038,8.928 0.863,9.754 44.094,9.754 44.094,0.027 44.093,0.025 44.119,0 47.6,0 47.6,15.443 41.707,15.443 41.707,20.904 39.487,23.124 39.487,25.013 36.627,25.013 36.627,15.443 33.658,12.474 0.053,12.474 0,12.474
LBOOST on Top Layer "LBOOST_L01_P019" (solid, pour order 19): 9.601,54.722 11.408,54.722 13.125,53.004 13.125,52.299 11.252,52.299 10.49,51.537 9.601,51.537
VOUT on Top Layer "VOUT_L01_P017" (solid, pour order 17): 21.412,54.331 21.539,54.458 21.565,54.458 26.314,54.458 26.822,53.95 26.822,52.527 26.086,51.791 23.139,51.791 23.139,48.692 21.412,48.692
LBUCK on Top Layer "LBUCK_L01_P018" (solid, pour order 18): 14.898,53.037 14.899,53.035 15.85,53.035 17.279,54.465 19.199,54.465 19.199,52.165 15.013,52.165 14.995,52.147 14.898,52.147
+1V8_DCDC on Top Layer "+1V8_DCDC_L01_P015" (solid, pour order 15): 46.303,37.157 51.424,37.157 50.133,35.866 50.133,34.99 45.99,34.99 45.99,36.532
VREGSW on Top Layer "VREGSW_L01_P014" (solid, pour order 14): 41.909,32.503 42.723,33.317 42.723,34.036 43.586,34.9 48.209,34.9 48.209,33.198 43.18,33.198 42.486,32.503
+3V2_VMCU on Top Layer "+3V2_VMCU_L01_P013" (solid, pour order 13): 41.552,32.68 41.552,35.965 41.832,36.246 44.756,36.246 45.023,35.979 45.023,35.446 44.756,35.179 43.231,35.179 42.14,34.088 42.14,32.996 41.877,32.733 41.604,32.733
+3V2_VMCU on Top Layer "+3V2_VMCU_L01_P012" (solid, pour order 12): 40.234,32.548 39.882,32.548 37.199,35.232 37.387,35.42 38.544,35.42 40.234,33.731

## Keep-outs
Keep-Out Layer:
  lines w0.508: -0.082,0.025 57.55,0.025 ; -0.028,7.025 ccw(c6.972,7.025) 6.972,0.025 ; 0,0 0,27.5 4.476,27.5 4.476,42.5 0,42.5 0,70.002 57.633,70.002 57.633,0 ; 0.011,63.002 cw(c7.011,63.002) 7.011,70.002 ; 50.633,0.051 ccw(c50.633,7.051) 57.633,7.051 ; 50.639,70.002 cw(c50.639,63.002) 57.639,63.002 ; 58.541,0 116.174,0 ; 58.603,7.049 ccw(c65.603,7.049) 65.603,0.049 ; 58.623,0 58.623,69.977 116.256,69.977 116.256,-0.025 ; 58.642,63.026 cw(c65.642,63.026) 65.642,70.026 ; 109.264,0.074 ccw(c109.264,7.074) 116.264,7.074 ; 109.27,70.026 cw(c109.27,63.026) 116.27,63.026

## Other copper
Top Layer:
  pour cut-out: 38.436,24.333 38.436,10.49 39.599,10.49 39.599,24.333
Multi-Layer:
  pour cut-out: 56.998,69.571 54.254,69.571 57.277,66.548 57.277,69.52 57.099,69.698 57.099,69.672 57.125,69.647
  pour cut-out: 0.286,42.5 4.476,42.5 4.476,27.782 4.194,27.5 0,27.5 0,42.214
  pour cut-out: 0.432,69.444 0.432,66.929 3.226,69.723 0.483,69.723 0.305,69.545 0.33,69.545 0.356,69.571

## Silkscreen, mask and mechanical layers (free items; w line width, h text height)
Top Overlay:
  text "C" at 51.689,17.7 h1.78
  text "U" at 51.689,14.075 h1.78
  text "B" at 51.689,10.45 h1.78
  text "I" at 51.943,6.825 h1.78
  text "T" at 51.689,3.2 h1.78

## Text inside footprints (layer, text, board x,y; h text height)
H3: Mechanical 13 AsslyInfo "PCB END" at -0.684,59.657 h0.5 r270
LCD1: Mechanical 13 AsslyInfo "PCB END" at 4.668,37.134 h0.64 r270
S1: Top Overlay "+" at 69.317,18.313 h3.81 r90; Top Overlay "-" at 69.444,32.918 h3.81 r90
S2: Top Overlay "+" at 69.317,43.688 h3.81 r90; Top Overlay "-" at 69.444,58.293 h3.81 r90
S3: Top Overlay "+" at 79.197,8.153 h3.81 r90; Top Overlay "-" at 79.324,22.758 h3.81 r90
S4: Top Overlay "+" at 79.197,33.567 h3.81 r90; Top Overlay "-" at 79.324,48.172 h3.81 r90
S5: Top Overlay "+" at 89.077,18.313 h3.81 r90; Top Overlay "-" at 89.204,32.918 h3.81 r90
S6: Top Overlay "+" at 89.077,43.688 h3.81 r90; Top Overlay "-" at 89.204,58.293 h3.81 r90
S7: Top Overlay "+" at 98.956,8.153 h3.81 r90; Top Overlay "-" at 99.083,22.758 h3.81 r90
S8: Top Overlay "+" at 98.956,33.567 h3.81 r90; Top Overlay "-" at 99.083,48.172 h3.81 r90
S9: Top Overlay "+" at 108.836,18.313 h3.81 r90; Top Overlay "-" at 108.963,32.918 h3.81 r90
S10: Top Overlay "+" at 108.836,43.688 h3.81 r90; Top Overlay "-" at 108.963,58.293 h3.81 r90